# Altium PCB Sensor Subsystem.PcbDoc
Units mil, origin at the board's own origin, x right, y up, seen from the top; angles counter-clockwise.
Board outline 6000 x 5085 mil, 4 copper layers (Top Layer, GND, PWR, Bottom Layer), stack 23.756 mil thick; 72 components, 30 nets, 282 pads, 69 vias.
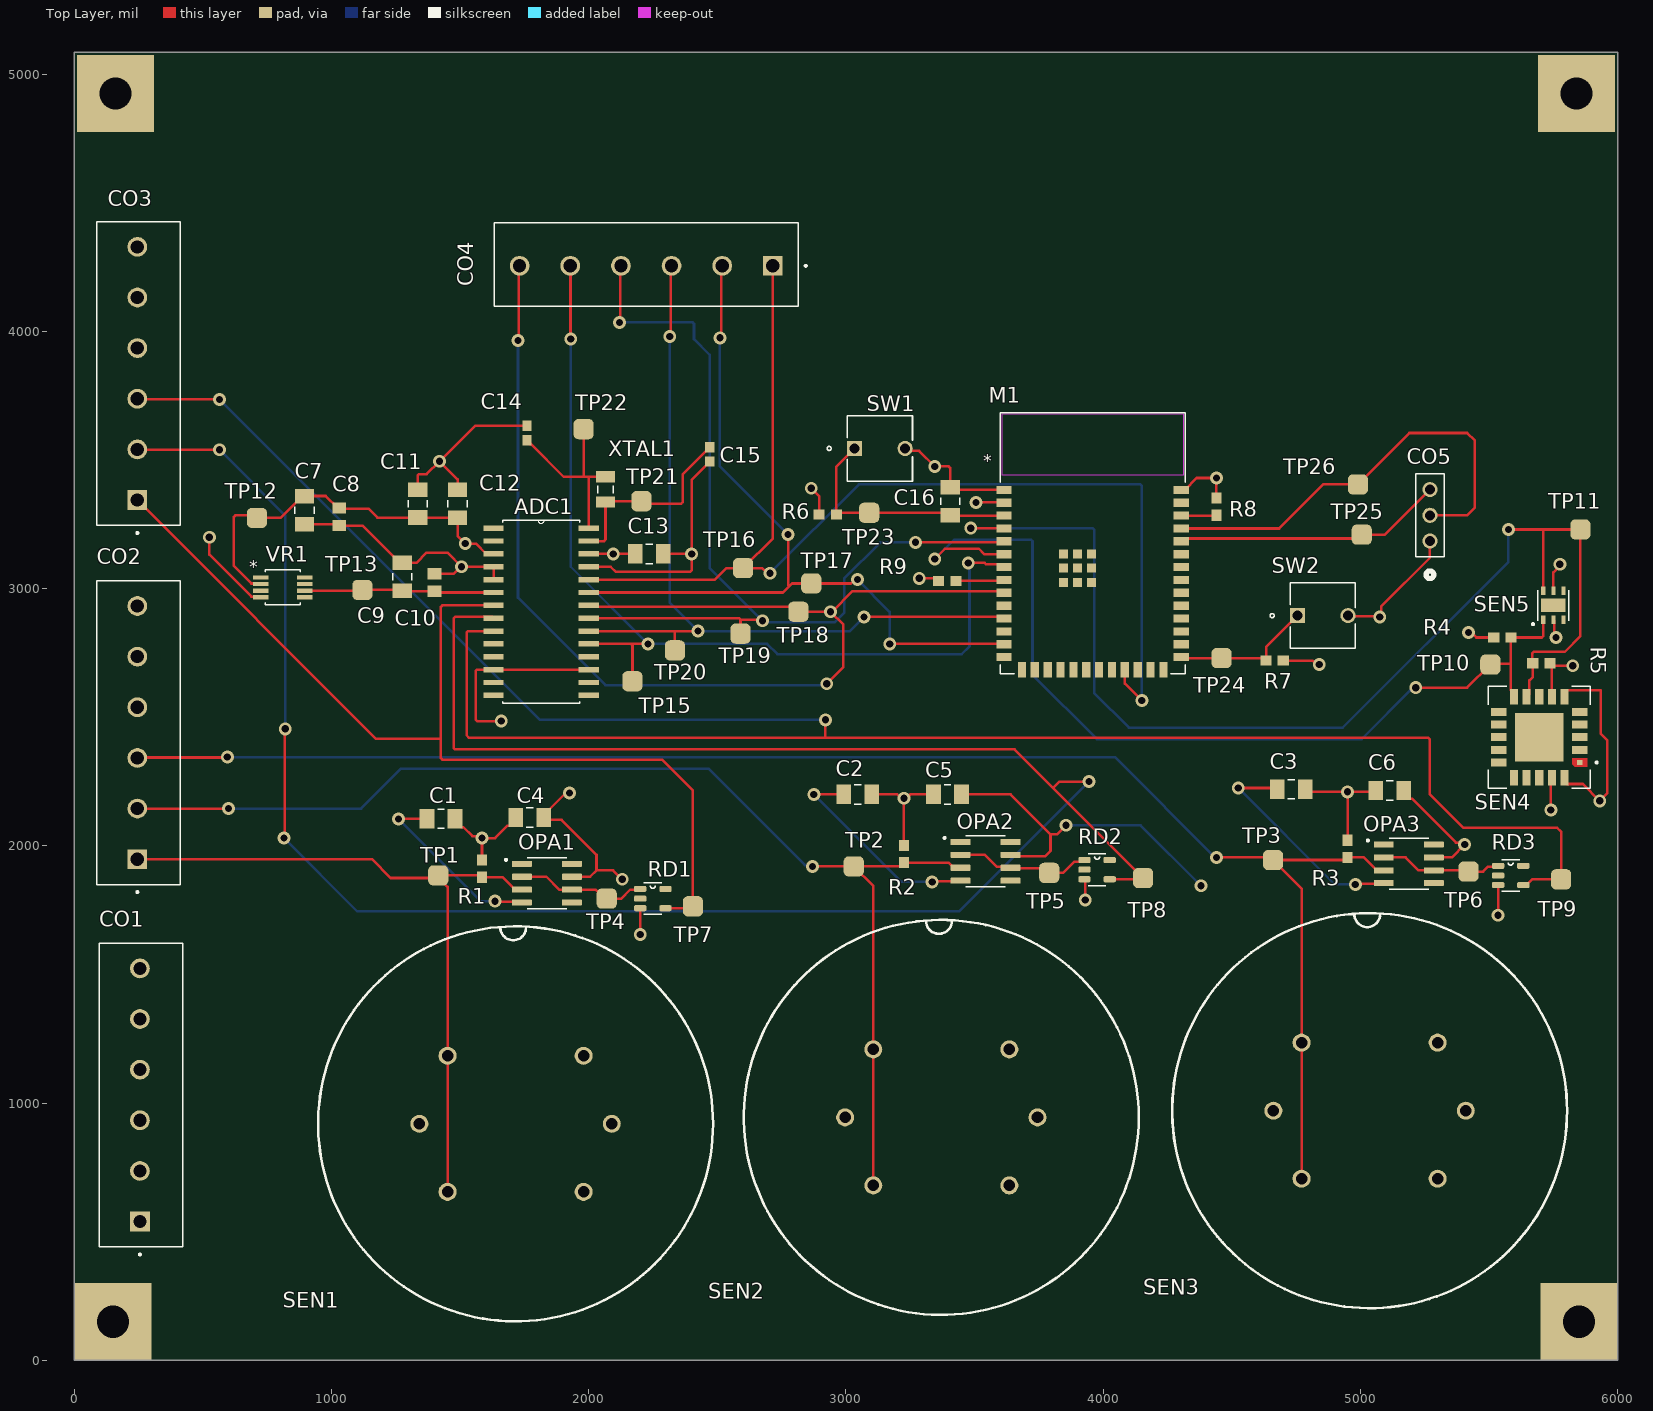
[diagram p0: Top Layer view]
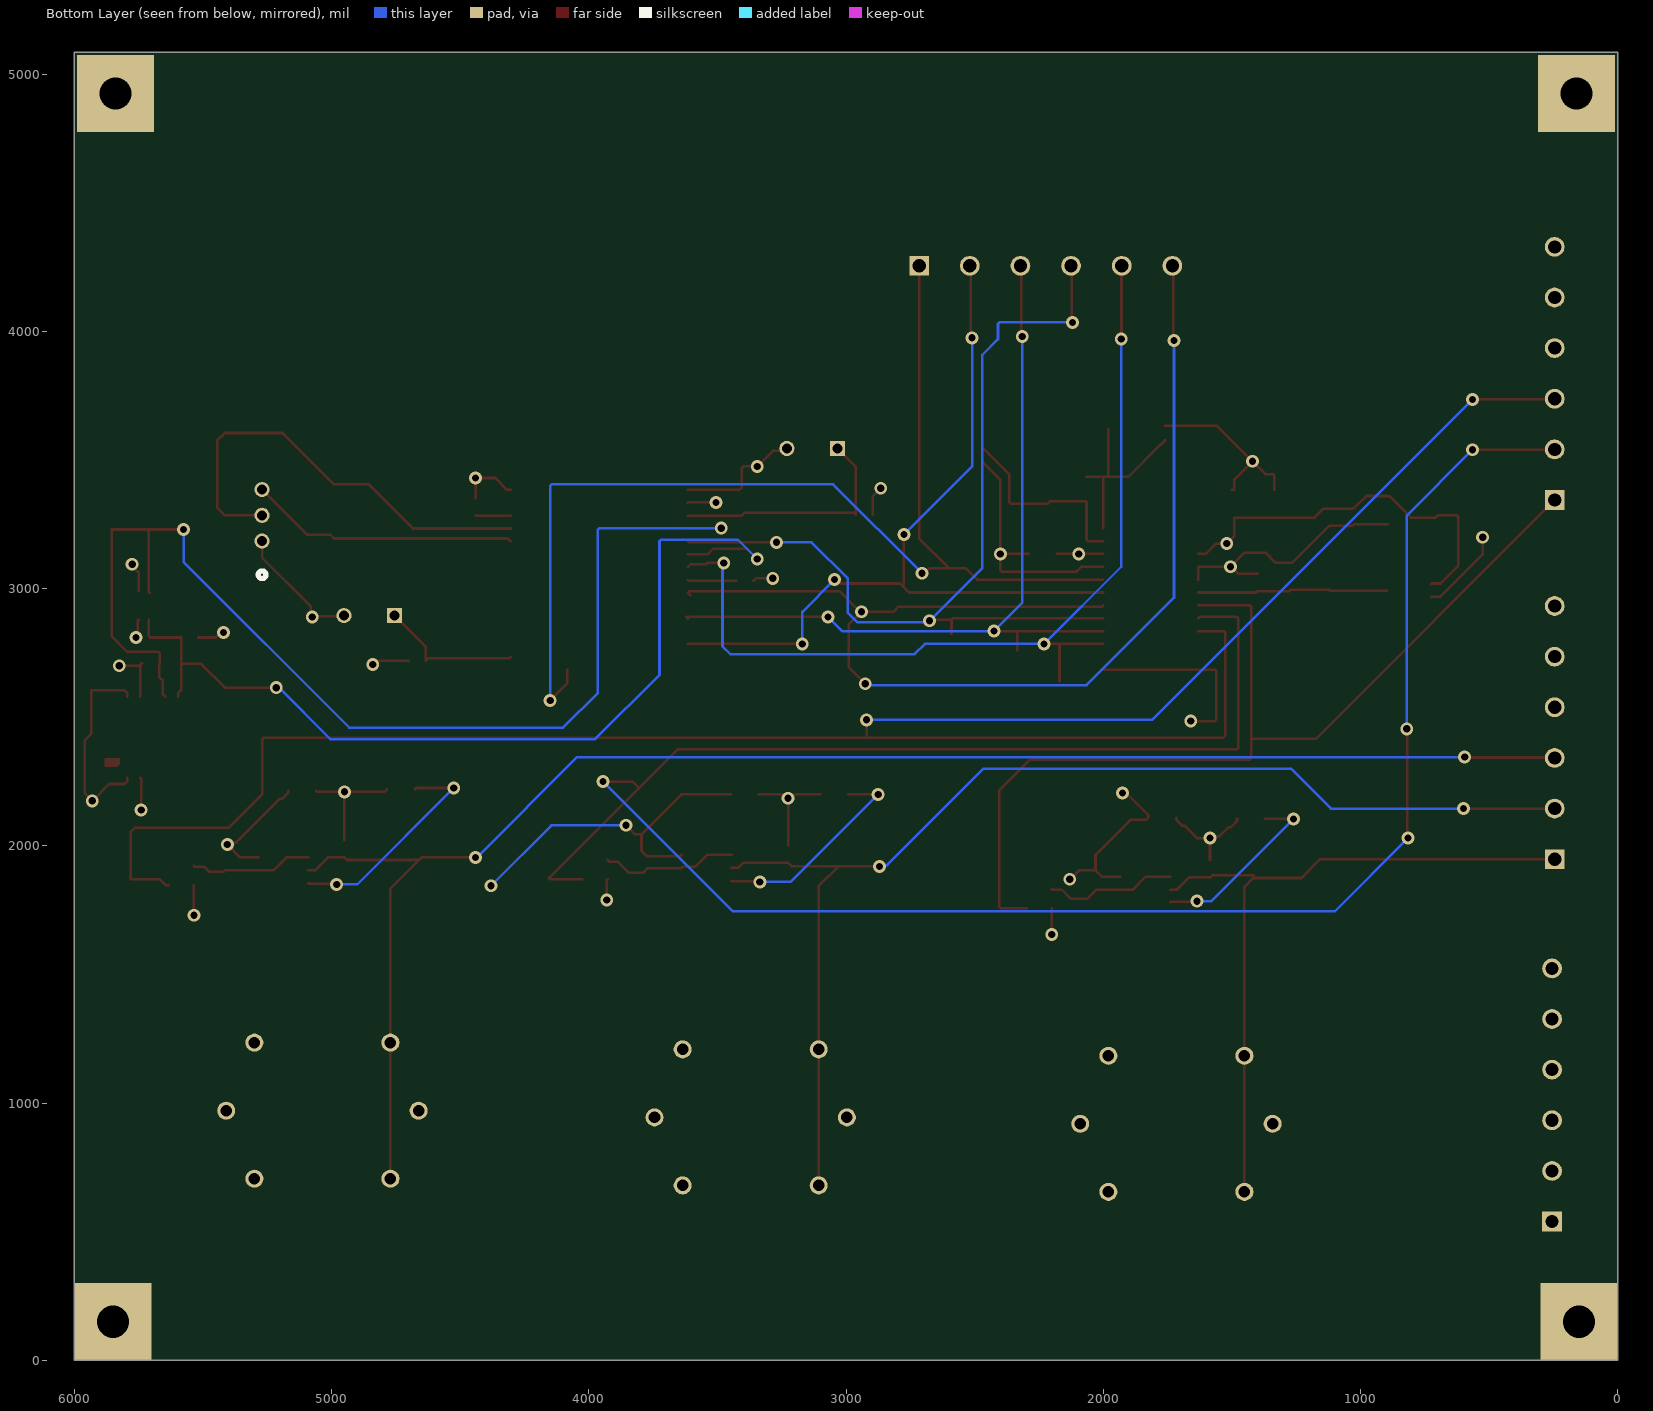
[diagram p1: Bottom Layer view, seen from below]
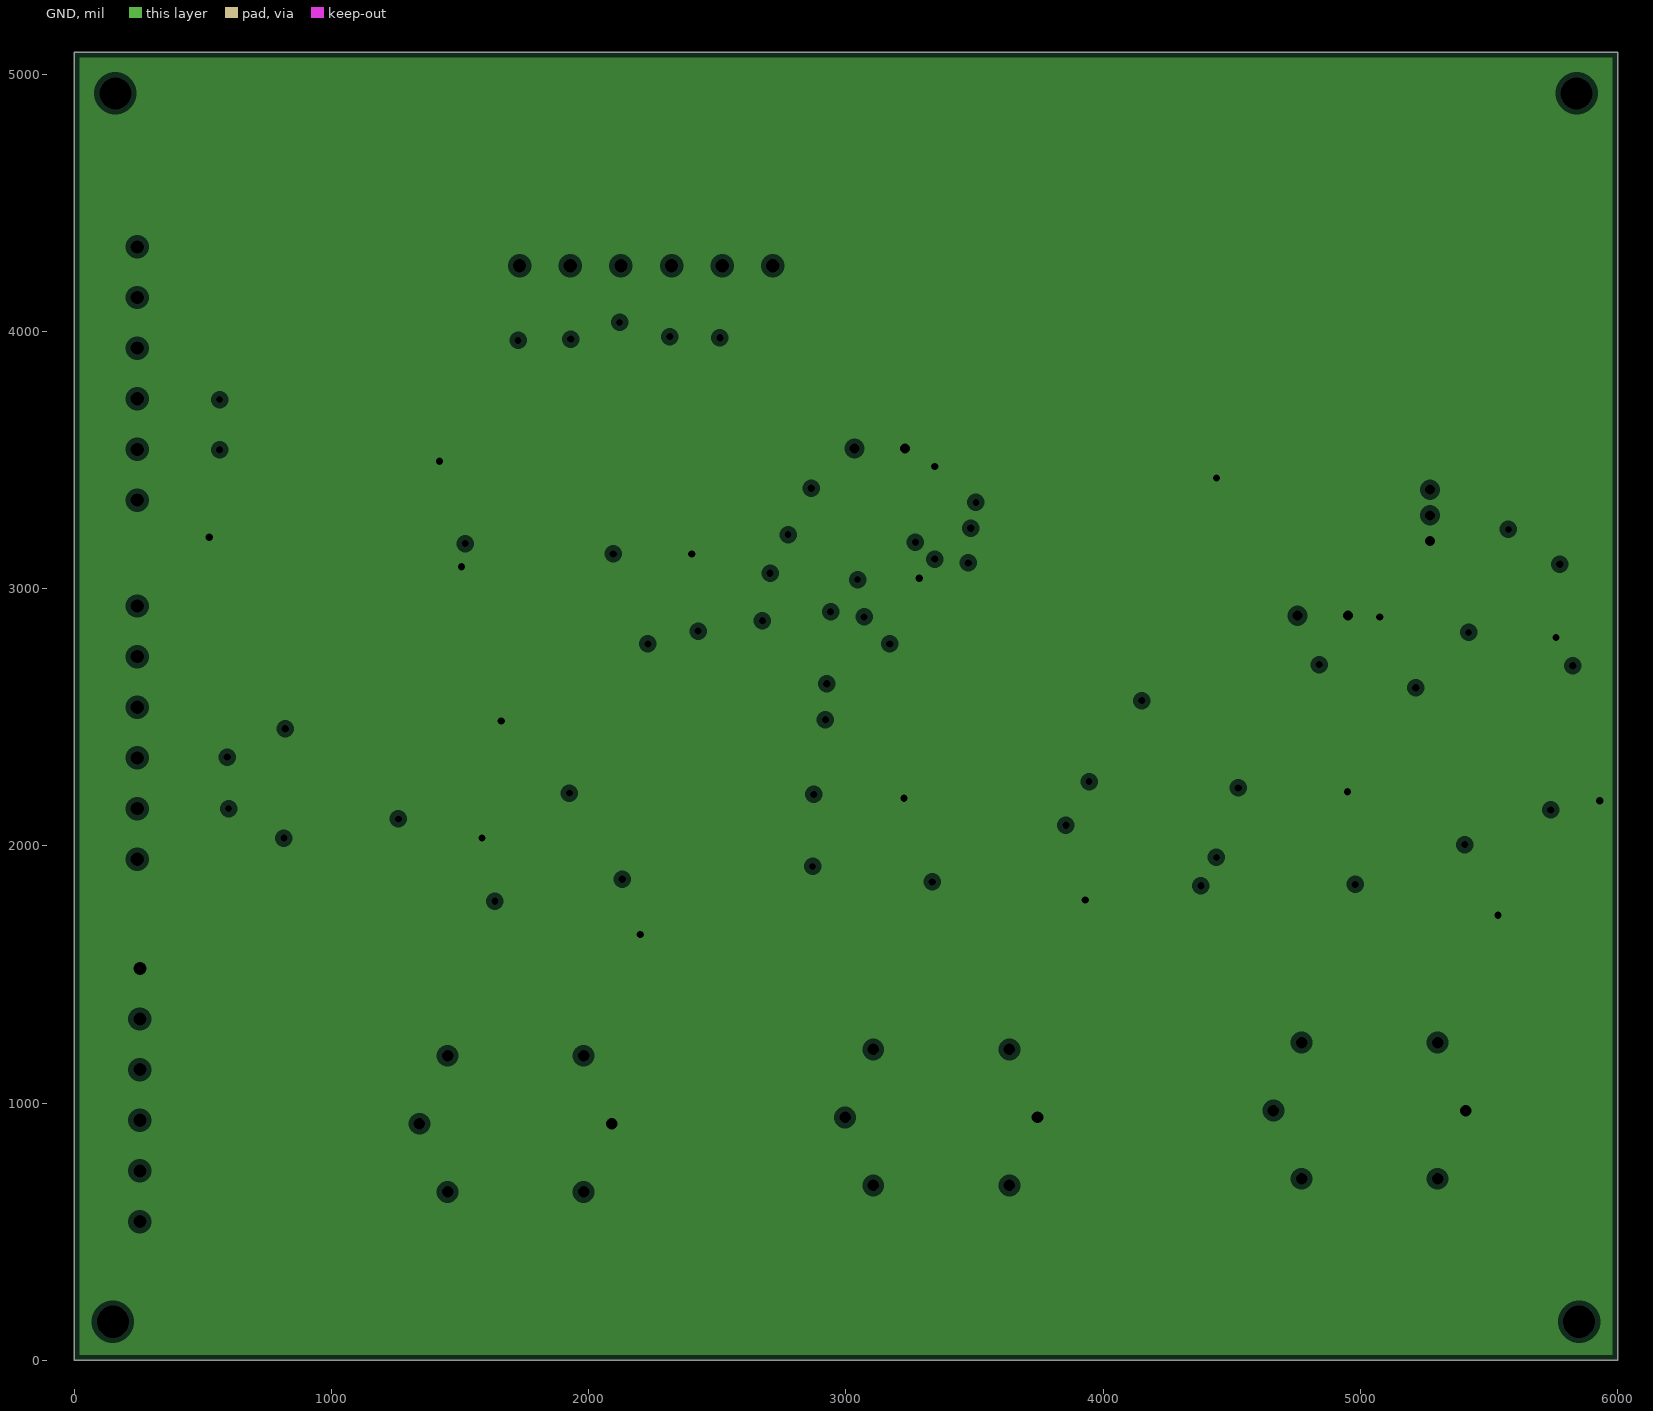
[diagram p2: GND, clearances drawn from the general rule]
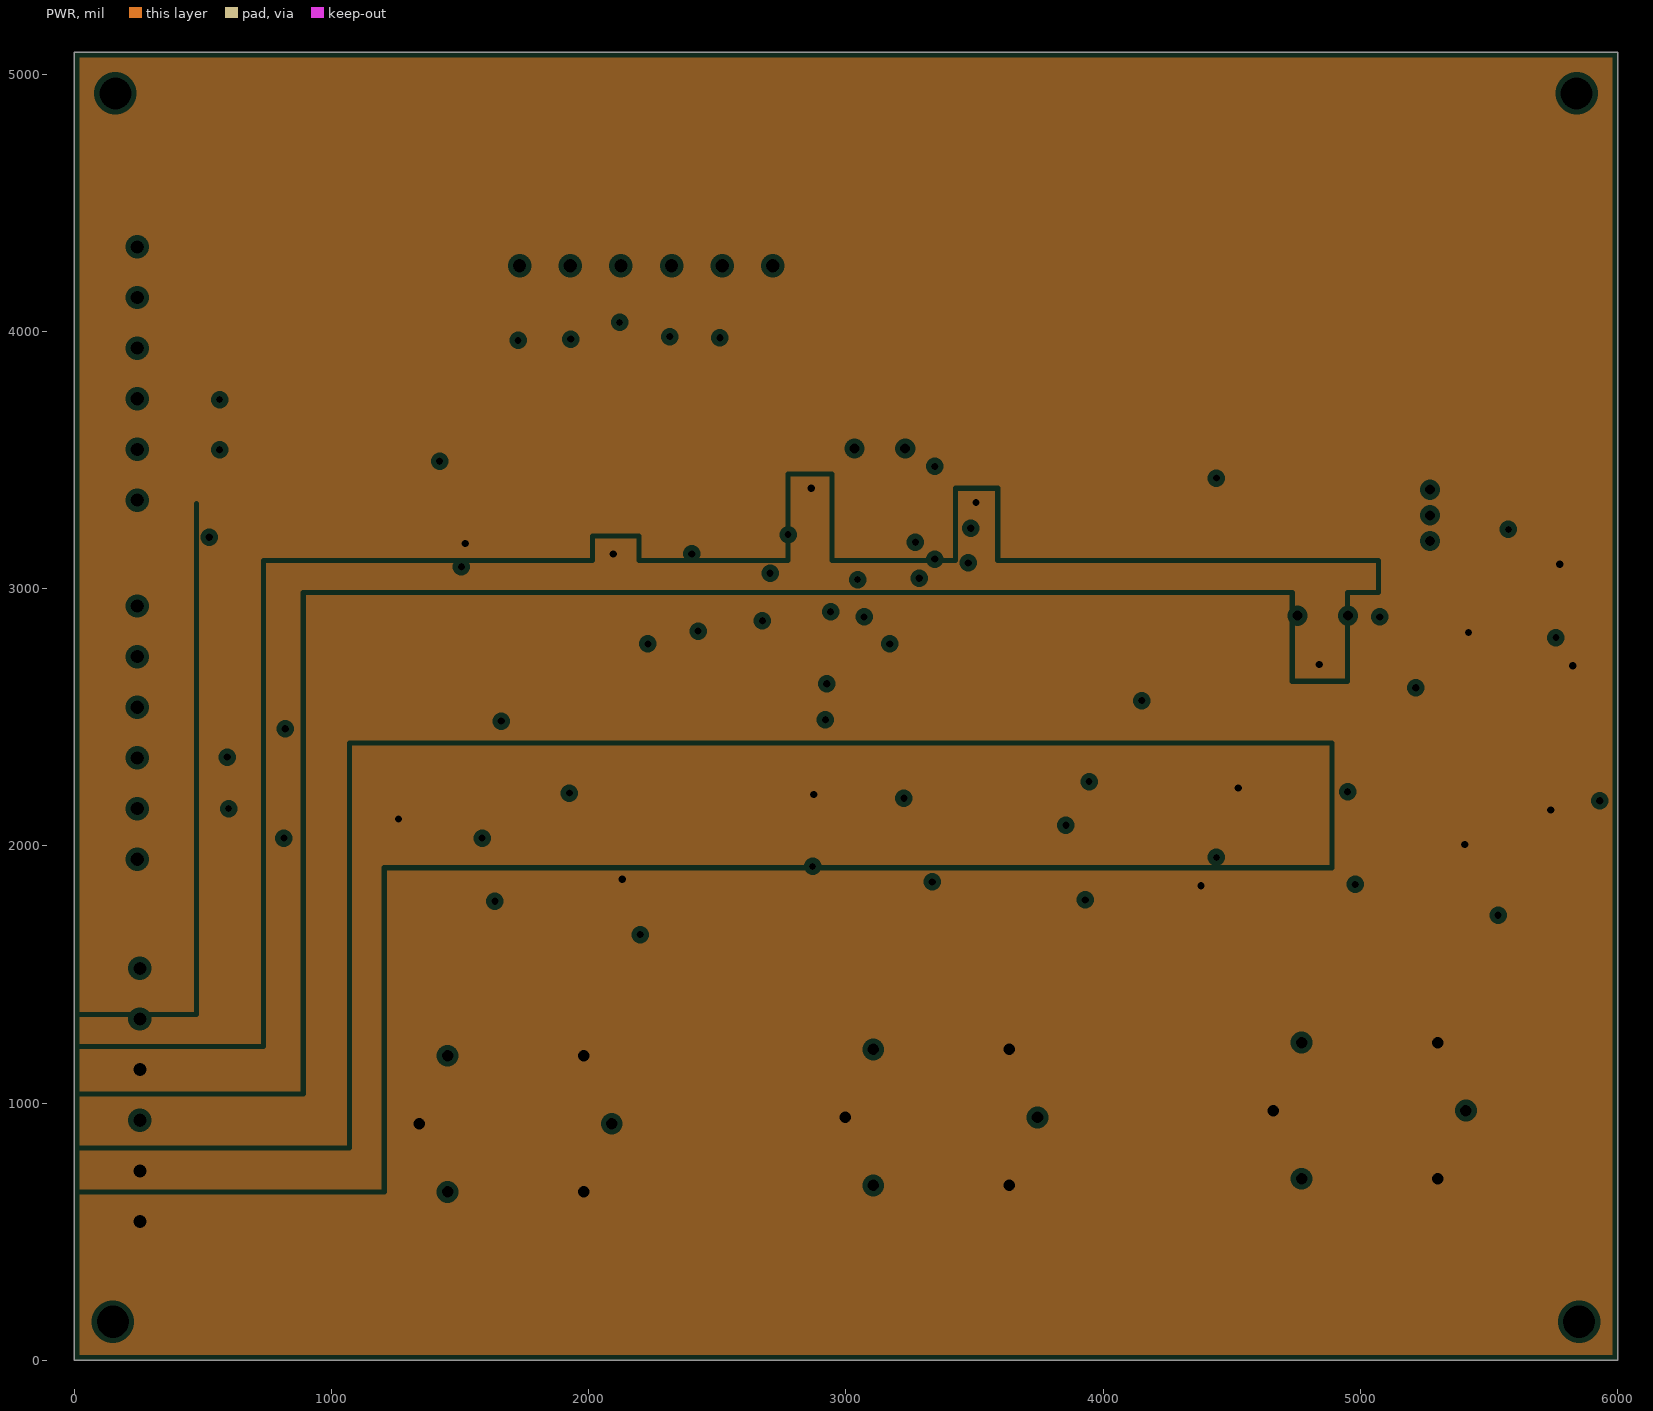
[diagram p3: PWR, clearances drawn from the general rule]

## Layer stack, top to bottom
Top Solder: solder mask 0.4, Solder Resist, Dk 3.5
Top Layer: signal copper 1.4
Dielectric 2: prepreg 2.8, PP-006, Dk 4.1
GND: plane copper 1.378, net GND
Dielectric 1: core 12.6, FR-4, Dk 4.8
PWR: plane copper 1.378, net 5V0
Dielectric 3: prepreg 2.8, PP-006, Dk 4.1
Bottom Layer: signal copper 1.4
Bottom Solder: solder mask 0.4, Solder Resist, Dk 3.5

## Board outline
0,0 6000,0 6000,5085 0,5085

## Design rules (kind name [scope] priority, off if disabled: settings)
Clearance [All] p1: gap=5 ignorepadtopadclearanceinfootprint=FALSE
HoleSize [All] p1: absolutevalues=TRUE maxlimit=250 minlimit=10 maxpercent=80.000 minpercent=20.000
MinimumSolderMaskSliver [All] p1: minsoldermaskwidth=5
PlaneClearance [All] p1: clearance=20
PlaneConnect [All] p1: planeconnectstyle=Relief reliefexpansion=20 reliefentries=4 reliefconductorwidth=10 reliefairgap=10
PolygonConnect [All] p1: connectstyle=Relief reliefconductorwidth=10 reliefentries=4 polygonreliefangle="90 Angle" airgapwidth=10
RoutingVias [All] p1: holewidth=28 width=50 viastyle="Through Hole" minholewidth=15 minwidth=35 maxholewidth=28 maxwidth=50
SilkToSilkClearance [All] p1: silktosilkclearance=5
SilkToSolderMaskClearance [IsPad] p1: minsilkscreentomaskgap=5 clearancetoexposedcopper=TRUE
SolderMaskExpansion [All] p1: expansion=4 istentingtop=FALSE
SupplyNets "Schematic Supply Nets_3" [InNet('3V3')] p1: voltage=0.000
SupplyNets "Schematic Supply Nets_2" [InNet('-5V0')] p2: voltage=0.000
SupplyNets "Schematic Supply Nets_1" [InNet('GND')] p3: voltage=0.000
SupplyNets "Schematic Supply Nets" [InNet('5V0')] p4: voltage=0.000
Width [All] p1: maxlimit=1000 minlimit=5 preferedwidth=10
24 further rules are at their usual default settings.

## Classes and differential pairs
component class "Sensor Subsystem Gas Monitoring": CO1
component class Microcontroller: C16 CO4 CO5 M1 R6 R7 R8 R9 SW1 SW2 TP23 TP24 TP25 TP26
component class "Digital to Analog": ADC1 C7 C8 C9 C10 C11 C12 C13 C14 C15 CO3 TP12 TP13 TP15 TP16 TP17 TP18 TP19 TP20 TP21 TP22 VR1 XTAL1
component class "Digital Sensors": R4 R5 SEN4 SEN5 TP10 TP11
component class "Analog Sensors": C1 C2 C3 C4 C5 C6 CO2 OPA1 OPA2 OPA3 R1 R2 R3 RD1 RD2 RD3 SEN2 SEN3 TP1 TP2 TP3 TP4 TP5 TP6 TP7 TP8 TP9

## Components (designator, comment, footprint, x,y, rotation, side; value= is the part's Value field where it differs from the comment)
ADC1 "AD7718BRZ-REEL7" SOIC127P1032X265-28N 1815,2910 r0 top
C1 "0.1uF" "0.1uF Capacitor" 1425.59,2105 r0 top
C2 "0.1uF" "0.1uF Capacitor" 3045.59,2200 r0 top
C3 "0.1uF" "0.1uF Capacitor" 4730.59,2220 r0 top
C4 "0.1uF" "0.1uF Capacitor" 1770,2110 r180 top
C5 "0.1uF" "0.1uF Capacitor" 3394.41,2200 r180 top
C6 "0.1uF" "0.1uF Capacitor" 5114.41,2215 r180 top
C7 "0.1uF" "0.1uF Capacitor" 895,3304.41 r270 top
C8 "47uF" CAPC2012X135N 1030,3278.98 r270 top
C9 "0.1uF" "0.1uF Capacitor" 1275,3045.59 r90 top
C10 "47uF" CAPC2012X135N 1400,3023.98 r90 top
C11 "10uF" CAPC3216X190N 1335,3330.59 r90 top
C12 "0.1uF" "0.1uF Capacitor" 1490,3329.41 r90 top
C13 "0.1uF" "0.1uF Capacitor" 2235.59,3135 r0 top
C14 "12pF" CAPC1608X90N 1760,3605 r90 top
C15 "12pF" CAPC1608X90N 2470,3522.09 r270 top
C16 "0.1uF" "0.1uF Capacitor" 3405,3339.41 r90 top
CO1 "1935200" PHOENIX_1935200 422.32,441.02 r90 top
CO2 "1935200" PHOENIX_1935200 412.32,1849.72 r90 top
CO3 "1935200" PHOENIX_1935200 412.32,3246.02 r90 top
CO4 "1935200" PHOENIX_1935200 2813.98,4422.32 r180 top
CO5 "PREC003SAAN-RC" CONN_PREC003SAAN-RC_SUL 5270,3185 r90 top
M1 "ESP32-S3-WROOM-1-N16R8" ESP32-S3-WROOM-1_EXP 3959.06,3176.73 r0 top
OPA1 "TL061ACD" SOIC127P599X175-8N 1837.24,1855 r0 top
OPA2 "TL061ACD" SOIC127P599X175-8N 3542.24,1940 r0 top
OPA3 "TL061ACD" SOIC127P599X175-8N 5187.76,1930 r0 top
R1 "10k" 0603 1585,1911.54 r90 top
R2 "10k" 0603 3225,1968.46 r90 top
R3 "10k" 0603 4950,1988.46 r90 top
R4 "10k" 0603 5551.54,2810 r0 top
R5 "10k" 0603 5703.46,2710 r180 top
R6 "10k" 0603 2929.04,3287.5 r0 top
R7 "10k" 0603 4666.54,2720 r180 top
R8 "10k" 0603 4440,3318.46 r90 top
R9 "10k" 0603 3393.46,3030 r180 top
RD1 "MAX5492LC10000+T" SOT95P280X145-5N 2249.02,1795 r0 top
RD2 "MAX5492LC10000+T" SOT95P280X145-5N 3975.98,1907.6 r0 top
RD3 "MAX5492LC10000+T" SOT95P280X145-5N 5584.02,1885 r0 top
SEN1 "MQ136" MQ136 1715.44,918.77 r0 top
SEN2 "MQ137" MQ137 3370.53,944.47 r0 top
SEN3 "MQ-4" MQ4 5035.03,970.68 r0 top
SEN4 "SCD41-D-R2" XDCR_SCD41-D-R2 5695,2422.48 r180 top
SEN5 "HDC1080DMBR" SON100P300X300X80-7N 5750,2935 r90 top
SW1 "TL59AF160Q" SW_TL59AF160Q_EWI 3033.15,3545 r0 top
SW2 "TL59AF160Q" SW_TL59AF160Q_EWI 4755,2895 r0 top
TP1 "TP" TestPoint 1415,1885 r0 top
TP2 "TP" TestPoint 3030,1920 r0 top
TP3 "TP" TestPoint 4660,1945 r0 top
TP4 "TP" TestPoint 2070,1795 r0 top
TP5 "TP" TestPoint 3790,1895 r0 top
TP6 "TP" TestPoint 5420,1900 r0 top
TP7 "TP" TestPoint 2405,1765 r0 top
TP8 "TP" TestPoint 4155,1875 r0 top
TP9 "TP" TestPoint 5780,1870 r0 top
TP10 "TP" TestPoint 5505,2705 r0 top
TP11 "TP" TestPoint 5855,3230 r90 top
TP12 "TP" TestPoint 710,3275 r0 top
TP13 "TP" TestPoint 1120,2995 r0 top
TP15 "TP" TestPoint 2170,2640 r0 top
TP16 "TP" TestPoint 2600,3080 r0 top
TP17 "TP" TestPoint 2865,3020 r0 top
TP18 "TP" TestPoint 2815,2910 r0 top
TP19 "TP" TestPoint 2590,2825 r0 top
TP20 "TP" TestPoint 2335,2760 r0 top
TP21 "TP" TestPoint 2205,3340 r0 top
TP22 "TP" TestPoint 1980,3620 r0 top
TP23 "TP" TestPoint 3090,3295 r0 top
TP24 "TP" TestPoint 4460,2730 r0 top
TP25 "TP" TestPoint 5005,3210 r0 top
TP26 "TP" TestPoint 4990,3405 r0 top
VR1 "ADR431BRMZ-R7" RM_8_ADI 810,3005 r0 top
XTAL1 "32.768 kHz" XTAL_ABS07-32.768KHZ-T 2065,3385.79 r90 top

## Footprints (in the part's own frame and the unit in brackets; to place one, negate y for a bottom-side part, rotate by r counter-clockwise, add the part's x,y. Pads: shape width x height; smd on the part's side, far side on the other; paste and mask are expansions set on the pad)
"0.1uF Capacitor" [mm]
  rect 1.45x1.91 smd: 1(-1.382,0) 2(1.382,0)
  silkscreen extent -0.34,-0.95 0.34,0.95
0603 [mm]
  rect 1.1x1 smd: 1(-0.85,0) 2(0.85,0)
CAPC1608X90N [mm]
  rect 1.01x0.93 smd: 1(-0.709,0) 2(0.709,0)
  body extent -0.8,-0.4 0.8,0.4, height 0.9
CAPC2012X135N [mm]
  rect 1.1x1.38 smd: 1(-0.863,0) 2(0.863,0)
CAPC3216X190N [mm]
  rect 1.45x1.91 smd: 1(-1.382,0) 2(1.382,0)
  silkscreen extent -0.34,-0.95 0.34,0.95
CONN_PREC003SAAN-RC_SUL [mil]
  round 59 / inner round 60 / far side round 59 hole 39 paste-99999 mask+0: 1(0,0) 2(100,0) 3(200,0)
  silkscreen extent -146,-55 261,55
ESP32-S3-WROOM-1_EXP [mil]
  rect 59x32 smd paste+0 mask+0: 1(-344.49,207.09) 2(-344.49,157.09) 3(-344.49,107.09) 4(-344.49,57.09) 5(-344.49,7.09) 6(-344.49,-42.91) 7(-344.49,-92.91) 8(-344.49,-142.91) 9(-344.49,-192.91) 10(-344.49,-242.91) 11(-344.49,-292.91) 12(-344.49,-342.91) 13(-344.49,-392.91) 14(-344.49,-442.91) 27(344.49,-442.91) 28(344.49,-392.91) 29(344.49,-342.91) 30(344.49,-292.91) 31(344.49,-242.91) 32(344.49,-192.91) 33(344.49,-142.91) 34(344.49,-92.91) 35(344.49,-42.91) 36(344.49,7.09) 37(344.49,57.09) 38(344.49,107.09) 39(344.49,157.09) 40(344.49,207.09)
  rect 32x59 smd paste+0 mask+0: 15(-275,-492.13) 16(-225,-492.13) 17(-175,-492.13) 18(-125,-492.13) 19(-75,-492.13) 20(-25,-492.13) 21(25,-492.13) 22(75,-492.13) 23(125,-492.13) 24(175,-492.13) 25(225,-492.13) 26(275,-492.13)
  rect 35x35 smd paste+0 mask+0: 41(-59.06,-96.85) 42(-114.17,-41.73) 43(-114.17,-96.85) 44(-114.17,-151.97) 45(-59.06,-151.97) 46(-3.94,-151.97) 47(-3.94,-96.85) 48(-3.94,-41.73) 49(-59.06,-41.73)
  Top Layer keep-out region: 354.5,502 -354.5,502 -354.5,266 354.5,266
  silkscreen extent -360,-507 360,507
MQ4 [mil]
  round 70 hole 45: 1(-263.96,264.32) 2(-373.52,-0.14) 3(-263.96,-264.61) 4(264.97,-264.62) 5(374.52,-0.14) 6(264.97,264.32)
  silkscreen extent -767,-768 768,768
MQ136 [mil]
  round 70 hole 45: 1(-264.38,265.17) 2(-373.93,0.71) 3(-264.38,-263.76) 4(264.56,-263.77) 5(374.1,0.71) 6(264.56,265.17)
  silkscreen extent -767,-767 768,768
MQ137 [mil]
  round 70 hole 45: 1(-264.46,264.46) 2(-374.02,0) 3(-264.46,-264.46) 4(264.47,-264.47) 5(374.02,0) 6(264.47,264.46)
  silkscreen extent -768,-768 768,768
PHOENIX_1935200 [mm]
  rect 1.95x1.95 / inner round 1.95 / far side rect 1.95x1.95 hole 1.3: 1(2.5,4.25)
  round 1.95 hole 1.3: 2(7.5,4.25) 3(12.5,4.25) 4(17.5,4.25) 5(22.5,4.25) 6(27.5,4.25)
  silkscreen extent -0.85,0 30,8.25
RM_8_ADI [mil]
  rect 60x17 smd paste+0 mask+0: 1(-85.5,38.39) 2(-85.5,12.8) 3(-85.5,-12.8) 4(-85.5,-38.39) 5(85.5,-38.39) 6(85.5,-12.8) 7(85.5,12.8) 8(85.5,38.39)
  silkscreen extent -68,-68 68,68, body extent -101,-63 101,63, height 43
SOIC127P599X175-8N [mm]
  rrect25% 1.97x0.6 smd: 1(-2.47,1.905) 2(-2.47,0.635) 3(-2.47,-0.635) 4(-2.47,-1.905) 5(2.47,-1.905) 6(2.47,-0.635) 7(2.47,0.635) 8(2.47,1.905)
  silkscreen extent -4.14,-2.52 1.95,2.52
SOIC127P1032X265-28N [mil]
  rect 78x21 smd: 1(-185,325) 2(-185,275) 3(-185,225) 4(-185,175) 5(-185,125) 6(-185,75) 7(-185,25) 8(-185,-25) 9(-185,-75) 10(-185,-125) 11(-185,-175) 12(-185,-225) 13(-185,-275) 14(-185,-325) 15(185,-325) 16(185,-275) 17(185,-225) 18(185,-175) 19(185,-125) 20(185,-75) 21(185,-25) 22(185,25) 23(185,75) 24(185,125) 25(185,175) 26(185,225) 27(185,275) 28(185,325)
  silkscreen extent -150,-356 150,356
SON100P300X300X80-7N [mm]
  rrect25% 0.86x0.42 smd: 1(-1.435,1) 2(-1.435,0) 3(-1.435,-1) 4(1.435,-1) 5(1.435,0) 6(1.435,1)
  rect 1.322x2.4 smd paste-2: 7(0,0)
  silkscreen extent -1.96,-1.53 1.5,2.12, body extent -1.5,-1.5 1.5,1.5, height 0.75
SOT95P280X145-5N [mm]
  rrect50% 1.22x0.6 smd: 1(-1.245,0.95) 2(-1.245,0) 3(-1.245,-0.95) 4(1.245,-0.95) 5(1.245,0.95)
  silkscreen extent -0.88,-1.57 0.88,1.57
SW_TL59AF160Q_EWI [mil]
  rect 59x59 / inner round 60 / far side rect 59x59 hole 39 paste-99999 mask+0: 1(0,0)
  round 59 / inner round 60 / far side round 59 hole 39 paste-99999 mask+0: 2(196.85,0)
  silkscreen extent -107,-127 225,127
TestPoint [mm]
  rrect50% 2x2 smd: 1(0,0)
XDCR_SCD41-D-R2 [mm]
  rect 0.5x0.5 smd paste-1 mask+0: 1(-4,2.5)
  rect 1.5x0.8 smd paste-0.125 mask+0.1: 2(-4,1.25) 3(-4,0) 4(-4,-1.25) 5(-4,-2.5) 11(4,-2.5) 12(4,-1.25) 13(4,0) 14(4,1.25) 15(4,2.5)
  rect 0.8x1.5 smd paste-0.125 mask+0.1: 6(-2.5,-4) 7(-1.25,-4) 8(0,-4) 9(1.25,-4) 10(2.5,-4) 16(2.5,4) 17(1.25,4) 18(0,4) 19(-1.25,4) 20(-2.5,4)
  rect 4.8x4.8 smd paste-3 mask+0.1: 21(0,0)
  Top Layer region: -3.25,2.65 -3.25,2.1 -4.75,2.1 -4.75,2.9 -3.5,2.9
  silkscreen extent -5.77,-5.05 5.05,5.05, body extent -5.05,-5.48 5.05,0.83, height 5.05
XTAL_ABS07-32.768KHZ-T [mm]
  rect 1.1x1.9 smd: 1(-1.25,0) 2(1.25,0)
  silkscreen extent -0.38,-0.75 0.38,0.75, body extent -1.6,-0.75 1.6,0.75, height 0.89

## Part data
ADC1: "24-Bit, 8/10-Channel, Low Voltage, Low Power, Sigma Delta ADC", Package="SOIC -28 Analog Devices", Check_prices=https://www.snapeda.com/parts/AD7718BRZ-REEL7/Analog+Devices/view-part/?ref=eda, MF="Analog Devices", MP=AD7718BRZ-REEL7, SnapEDA_Link=https://www.snapeda.com/parts/AD7718BRZ-REEL7/Analog+Devices/view-part/?ref=snap
C1 C2 C3 C4 C5 C6 C7 C9 C12 C13 C16: library part CC1206JRX7R9BB104, "No Description Available", Mfr_Name=Yageo
C8 C10: library part CL21A476MQYNNNG, "47ÂµF Â±20% 6.3V Ceramic Capacitor X5R 0805 _2012 Metric_", Package="0805 Samsung", Digi-Key_Part_Number=1276-6467-1-ND, Digi-Key_Purchase_URL=https://www.digikey.com/product-detail/en/samsung-electro-mechanics/CL21A476MQYNNNG/1276-6467-1-ND/5958095?utm_source=snapeda&utm_medium=aggregator&utm_campaign=symbol, MF="Samsung Electro-Mechanics", MP=CL21A476MQYNNNG, SnapEDA_Link=https://www.snapeda.com/parts/CL21A476MQYNNNG/Samsung%20Electro-Mechanics/view-part/3597942/?ref=snap
C11: library part GRJ31CR61E106KE11L, "CAP CER 10UF 25V X5R 1206", Package=None, Availability=Unavailable, MP=GRJ31CR61E106KE11L, Price=None
C14 C15: library part CGA3E2C0G1H120J080AA, "Multilayer Ceramic Capacitor, CGA Series, 12 pF, - 5%, C0G / NP0, 50 V, 0603 [1608 Metric]", Package="1608 TDK", Check_prices=https://www.snapeda.com/parts/CGA3E2C0G1H120J080AA/TDK/view-part/?ref=eda, MF=TDK, MP=CGA3E2C0G1H120J080AA, SnapEDA_Link=https://www.snapeda.com/parts/CGA3E2C0G1H120J080AA/TDK/view-part/?ref=snap
CO1 CO2 CO3 CO4: "PCB terminal block - nominal current: 17.5 A - rated voltage (III/2): 400 V - nominal cross section: 1.5 mm² - pitch: 5 mm - number of positions: 6 - connection method: Screw connection with wire protector - mounting: Wave soldering - conductor/PCB connection direction: 0 ° - color: green - Pin layout: Linear pinning - Solder pin [P]: 3.5 mm", Package=None, Check_prices=https://www.snapeda.com/parts/1935200/Littelfuse/view-part/?ref=eda, MF=Littelfuse, MP=1935200, SnapEDA_Link=https://www.snapeda.com/parts/1935200/Littelfuse/view-part/?ref=snap
CO5: "No Description Available", Mfr_Name=Sullins, RefDes=RefDes, Type=Type
M1: "No Description Available", Mfr_Name="Espressif Systems", RefDes=RefDes, Type=Type
OPA1 OPA2 OPA3: Package=None, Availability=Unavailable, MP=TL061ACD, Price=None
R1 R2 R3 R4 R5 R6 R7 R8 R9: library part RC0603FR-1310KL, "http://octopart.com/rc0603fr-1310kl-yageo+%2F+phycomp-25905087", Package=None, Availability=Unavailable, MP=RC0603FR-1310KL, Price=None
RD1 RD2 RD3: "Res NET 9.09K Ohm/910 Ohm 0.1% 0.5714W Â±35ppm/Â°C VOLT/D 5-Pin SOT-23 Gull Wing SMD T/R", Package=None, Check_prices=https://www.snapeda.com/parts/MAX5492LC10000+T/Maxim+Integrated/view-part/?ref=eda, MF="Maxim Integrated Products", MP=MAX5492LC10000+T, SnapEDA_Link=https://www.snapeda.com/parts/MAX5492LC10000+T/Maxim+Integrated/view-part/?ref=snap
SEN1: "Hydrogen Sulfide Sensor"
SEN2: "Ammonia Sensor"
SEN3: "Methane Sensor"
SEN4: "Air Quality Sensor CO2 Sensor 2.5V/3.3V/5V 20-Pin SMD EP", Package=None, Availability="In Stock", Check_prices=https://www.snapeda.com/parts/SCD41-D-R2/Sensirion+AG/view-part/?ref=eda, MF="Sensirion AG", MP=SCD41-D-R2, Price=None, Purchase-URL=https://pricing.snapeda.com/search/part/SCD41-D-R2/?ref=eda, SnapEDA_Link=https://www.snapeda.com/parts/SCD41-D-R2/Sensirion+AG/view-part/?ref=snap
SEN5: "Temperature and Humidity Sensor", Package="WSON-6 Texas Instruments", Availability=Unavailable, MF="Texas Instruments", MP=HDC1080DMBR, Price=None, Purchase-URL=https://pricing.snapeda.com/search/part/HDC1080DMBR/?ref=eda, SnapEDA_Link=https://www.snapeda.com/parts/HDC1080DMBR/Texas%20Instruments/view-part/472819/?ref=snap
SW1 SW2: "No Description Available", Mfr_Name=E-Switch
TP1 TP2 TP3 TP4 TP5 TP6 TP7 TP8 TP9 TP10 TP11 TP12 TP13 TP15 TP16 TP17 TP18 TP19 TP20 TP21 TP22 TP23 TP24 TP25 TP26: library part TestPoint, "Test point for voltage, current, ect."
VR1: "No Description Available", Mfr_Name="Analog Devices Inc", RefDes=RefDes, Type=Type
XTAL1: library part ABS07-32.768KHZ-T, "32.768 kHz Â±20ppm Crystal 12.5pF 70 kOhms 2-SMD, No Lead", Package="SMD-2 Abracon LLC", Availability="In Stock", Check_prices=https://www.snapeda.com/parts/ABS07-32.768KHZ-T/Abracon+LLC/view-part/?ref=eda, MF=Abracon, MP=ABS07-32.768KHZ-T, Price=None, Purchase-URL=https://pricing.snapeda.com/search/part/ABS07-32.768KHZ-T/?ref=eda, SnapEDA_Link=https://www.snapeda.com/parts/ABS07-32.768KHZ-T/Abracon+LLC/view-part/?ref=snap

## Free pads (board coordinates)
  rect 300x300 hole 125: MH(150,150) MH(160,4925) MH(5840,4925) MH(5850,150)

## Via types
v1: diameter 50, hole 28, Top Layer to Bottom Layer, 69 vias

## Nets (pads, with @x,y where several pads share a name; then routed paths per layer and width w, separated by ;. In a path a pad name is that pad's centre, name@x,y a point inside that pad or via, vN(x,y) a via of type N, cw(c..) or ccw(c..) an arc to the next point about the centre after c; other vN are vias at no path point)
3V3: ADC1.26 C13.1 CO1.4 M1.2 R6.1 R7.1 | length 552.6
  Top Layer w10: ADC1.26 v1(2095,3135) C13.1 ; v1(2865,3390) 2895.57,3359.43 R6.1 ; v1(3505,3335) 3613.39,3335 M1.2 ; R7.1 4814.18,2720 4829.18,2705 v1(4840,2705)
5V0: ADC1.3 C4.1 C5.1 C6.1 C7.1 C8.1 C11.1 C12.1 CO1.1 OPA1.7 OPA2.7 OPA3.7 R4.1 R5.1 SEN1.2 SEN1.4 SEN1.6 SEN2.2 SEN2.4 SEN2.6 SEN3.2 SEN3.4 SEN3.6 SEN4.7 SEN4.19 SEN5.5 TP12.1 VR1.2 | length 4588
  Top Layer w10: CO1.1 CO1.1@265.55,550 ; VR1.2 722.41,3019.89 688.29,3019.89 620,3088.17 620,3279.14 625.86,3285 700,3285 TP12.1 802.13,3275 885.94,3358.82 C7.1 896.18,3360 977.44,3360 1024.49,3312.95 C8.1 1032.95,3310 1145,3310 1178.82,3276.18 C11.1 1336.18,3275 C12.1 1490,3205 v1(1520,3175) 1561.5,3175 1601.5,3135 ADC1.3 ; v1(1925,2205) 1917.35,2197.35 1902.7,2197.35 1824.41,2119.06 C4.1 1833.46,2100.94 1894.06,2100.94 2030,1965 2030,1905 ; OPA1.7 2005,1880 2030,1905 ; v1(2130,1870) 2095,1905 2030,1905 ; C5.1 3640,2200 3795,2045 ; OPA2.7 3644.49,1960 3775,1960 3795,1980 3795,2045 ; v1(3855,2080) 3820,2045 3795,2045 ; C6.1 5168.82,2205.94 5192.36,2182.4 5201.42,2182.4 5371.17,2012.65 5397.35,2012.65 v1(5405,2005) 5355,1955 OPA3.7 ; v1(5420,2830) 5430.82,2830 5450.82,2810 R4.1 ; R5.1@5738.9,2710 R5.1 R5.1@5744.21,2702.72 ; v1(5740,2140) 5740,2260.79 SEN4.19 ; SEN4.7 R5.1@5744.21,2702.72 ; SEN5.5 5750,3063.43 5775,3088.43 v1(5775,3095) ; v1(5825,2700) 5746.93,2700 R5.1@5744.21,2702.72
  Bottom Layer w10: v1(3855,2080) 4145,2080 v1(4380,1845)
-5V0: C1.1 C2.1 C3.1 CO1.2 OPA1.4 OPA2.4 OPA3.4 | length 2437.2
  Top Layer w10: CO1.2 CO1.2@259.35,740.65 ; v1(1260,2105) C1.1 ; v1(1635,1785) 1637.5,1782.5 1737.5,1782.5 OPA1.4 ; v1(2875,2200) C2.1 ; v1(3335,1860) 3337.5,1862.5 3442.5,1862.5 OPA2.4 ; v1(4525,2225) 4671.18,2225 C3.1 ; v1(4980,1850) 4982.5,1852.5 5088.01,1852.5 OPA3.4
  Bottom Layer w10: v1(1260,2105) 1580,1785 v1(1635,1785) ; v1(2875,2200) 3215,1860 v1(3335,1860) ; v1(4525,2225) 4900,1850 v1(4980,1850)
CH4: CO2.3 OPA3.3 R3.1 SEN3.1 SEN3.3 TP3.1 | length 6322.3
  Top Layer w10: CO2.3 246.57,2343.43 593.43,2343.43 v1(595,2345) ; v1(4440,1955) 4650,1955 TP3.1 ; SEN3.3 SEN3.1 4771.06,1833.94 TP3.1 ; OPA3.3 5063.54,1905 5013.54,1955 R3.1 4940,1945 TP3.1
  Bottom Layer w10: v1(595,2345) 4045,2345 4435,1955 v1(4440,1955)
"CH4 2": ADC1.9 CO3.3 RD3.4 TP9.1 | length 8645.6
  Top Layer w10: CO3.3 246.57,3736.57 563.43,3736.57 v1(565,3735) ; ADC1.9 1530.86,2835 1525,2829.14 1525,2430 1535,2420 2920,2420 ; v1(2920,2490) 2920,2420 ; RD3.4 5645.24,1847.6 5667.64,1870 TP9.1 5780,2055 5765,2070 5400,2070 5270,2200 5270,2414.14 5264.14,2420 2920,2420
  Bottom Layer w10: v1(565,3735) 1810,2490 v1(2920,2490)
CLK: ADC1.20 CO4.3 M1.11 TP20.1 | length 3194.2
  Top Layer w10: ADC1.20 2329.14,2835 ; v1(2315,3980) 2318.43,3983.43 2318.43,4251.57 CO4.3 ; TP20.1 2335,2829.14 2329.14,2835 ; v1(2425,2835) 2329.14,2835 ; v1(3070,2890) 3608.39,2890 M1.11 3614.57,2884.57 M1.11@3620,2890
  Bottom Layer w10: v1(2315,3980) 2315,2945 v1(2425,2835) 3015,2835 v1(3070,2890)
CS*: ADC1.21 CO4.4 M1.5 TP19.1 | length 3669.9
  Top Layer w10: ADC1.21 2584.14,2885 2589.77,2879.37 ; v1(2120,4035) 2122.5,4037.5 2122.5,4252.5 CO4.4 ; TP19.1 2590,2879.14 2589.77,2879.37 ; v1(2675,2875) 2670.63,2879.37 2589.77,2879.37 ; v1(3270,3180) 3610.75,3180 M1.5 M1.5@3608.39,3190
  Bottom Layer w10: v1(2120,4035) 2403.28,4035 2409.14,4029.14 2409.14,3970 2470,3909.14 2470,3080 v1(2675,2875) 2680,2870 2956.57,2870 2992.5,2905.93 2992.5,3039.07 3133.43,3180 v1(3270,3180)
GND: ADC1.4 ADC1.5 ADC1.12 ADC1.17 ADC1.25 C1.2 C2.2 C3.2 C4.2 C5.2 C6.2 C7.2 C8.2 C9.2 C10.2 C11.2 C12.2 C13.2 C14.2 C15.2 C16.2 CO1.6 CO5.1 M1.1 M1.40 R1.2 R2.2 R3.2 R8.2 R9.2 RD1.3 RD2.3 RD3.3 SEN1.5 SEN2.5 SEN3.5 SEN4.6 SEN4.20 SEN5.2 SW1.2 SW2.2 VR1.4 | length 7533.3
  Top Layer w10: CO1.6 CO1.6@255.65,1524.35 ; v1(525,3200) 525,3131.99 688.29,2968.7 722.41,2968.7 VR1.4 ; C7.2 1025,3250 C8.2 1120.94,3245 1265.94,3100 C9.2 1330,3100 1370,3140 1450,3140 v1(1505,3085) ; C11.2 1335,3439.14 1340.86,3445 1370,3445 v1(1420,3495) ; C10.2 1475.48,3057.95 1502.53,3085 v1(1505,3085) ; C1.2 1480,2095.94 1503.54,2072.4 1512.6,2072.4 1547.35,2037.65 1577.35,2037.65 v1(1585,2030) ; C12.2@1500,3385 1498.82,3383.82 C12.2 1490,3425 v1(1420,3495) ; R1.2 v1(1585,2030) ; ADC1.5 ADC1.4 v1(1505,3085) ; v1(1660,2485) 1565.86,2485 1560,2490.86 1560,2679.14 1565.86,2685 ADC1.12 ADC1.17 ; C4.2 1715.59,2100.94 1692.05,2077.4 1682.99,2077.4 1635.59,2030 v1(1585,2030) ; C14.2 1557.91,3632.91 v1(1420,3495) ; ADC1.25 2085,3085 2105,3065 2394.14,3065 2400,3070.86 v1(2400,3135) ; v1(2200,1655) RD1.3 ; C13.2 v1(2400,3135) ; C15.2 2470,3492.6 2400,3422.6 v1(2400,3135) ; C2.2 3199.18,2200 3214.18,2185 v1(3225,2185) ; R2.2 v1(3225,2185) ; SW1.2 3239.38,3535.62 3284.38,3535.62 v1(3345,3475) 3399.14,3475 3405,3469.14 C16.2 3415,3383.82 M1.1 ; v1(3285,3040) 3350,3040 R9.2 ; C5.2 3250.82,2200 3235.82,2185 v1(3225,2185) ; RD2.3 3930,1867.17 v1(3930,1790) ; M1.40 4317.04,3383.82 4363.22,3430 v1(4440,3430) R8.2 ; C3.2 4795,2210 v1(4950,2210) ; R3.2 v1(4950,2210) ; SW2.2 4954.35,2892.5 5072.5,2892.5 v1(5075,2890) 5080,2895 5080,2930 5270,3120 CO5.1 ; C6.2 5055,2210 v1(4950,2210) ; v1(5535,1730) RD3.3 ; SEN5.2 5753.27,2875.24 5753.27,2816.73 v1(5760,2810) ; SEN4.20 5793.43,2251.22 5804.17,2240.47 5864.53,2240.47 v1(5930,2175) 5960,2205 5960,2410 5934.49,2435.51 5934.49,2604.49 5804.17,2604.49 5793.43,2593.74 SEN4.6
H2S: CO2.1 OPA1.3 R1.1 SEN1.1 SEN1.3 TP1.1 | length 2793.3
  Top Layer w10: CO2.1 1156.85,1948.15 1230,1875 1412.95,1875 TP1.1@1415,1877.05 ; SEN1.3 SEN1.1 1451.06,1840.99 TP1.1@1415,1877.05 ; R1.1@1584.02,1877.09 1576.1,1885 TP1.1 TP1.1@1415,1877.05 ; R1.1 1664.96,1878.07 1713.03,1830 OPA1.3
"H2S 2": ADC1.7 CO3.1 RD1.4 TP7.1 | length 3952.5
  Top Layer w10: CO3.1 1173.65,2415.8 1425,2415.8 ; ADC1.7 1430.86,2935 1425,2929.14 1425,2415.8 ; RD1.4 2397.6,1757.6 TP7.1 2405,2215 2285,2335 1430.86,2335 1425,2340.86 1425,2415.8
MISO: ADC1.23 CO4.2 M1.13 TP17.1 | length 3173
  Top Layer w10: ADC1.23 2755,2985 2780,3010 ; v1(2510,3975) 2514.35,3979.35 2514.35,4250.65 CO4.2 ; v1(2775,3210) 2775,3015 2780,3010 ; v1(3045,3035) 3034.18,3035 3019.18,3020 TP17.1 2790,3020 2780,3010 ; v1(3170,2785) 3613.39,2785 M1.13
  Bottom Layer w10: v1(2510,3975) 2510,3475 v1(2775,3210) ; v1(3045,3035) 3170,2910 v1(3170,2785)
MOSI: ADC1.24 CO4.1 M1.23 TP16.1 | length 4526.2
  Top Layer w10: ADC1.24 2490,3035 2535,3080 TP16.1 ; v1(2705,3060) 2694.18,3060 2674.18,3080 TP16.1 ; CO4.1 2715.55,3195.55 TP16.1 ; M1.23 4084.06,2630.94 v1(4150,2565)
  Bottom Layer w10: v1(2705,3060) 3050,3405 4144.14,3405 4150,3399.14 v1(4150,2565)
NetADC1_6: ADC1.6 C9.1 C10.1 TP13.1 VR1.6 | length 739.8
  Top Layer w10: VR1.6 1117.2,2992.2 TP13.1 1271.18,2995 C9.1 1276.18,2990 C10.1 1405,2985 ADC1.6
NetADC1_27: ADC1.27 C15.1 TP21.1 XTAL1.1 | length 778.8
  Top Layer w10: ADC1.27 2059.14,3185 2065,3190.86 XTAL1.1 2068.43,3340 TP21.1 2215,3330 2359.14,3330 2365,3335.86 2365,3443.43 2470,3548.43 C15.1
NetADC1_28: ADC1.28 C14.1 TP22.1 XTAL1.2 | length 752.2
  Top Layer w10: C14.1 1760,3575.51 1773.31,3562.2 1774.88,3562.2 1902.09,3435 1980,3435 ; TP22.1 1980,3435 ; ADC1.28 2000,3429.14 2005.86,3435 ; XTAL1.2 2005.86,3435 ; 1980,3435 2005.86,3435
NetC16_1: C16.1 M1.3 R6.2 SW1.1 TP23.1 | length 946.6
  Top Layer w10: SW1.1 2962.5,3474.35 R6.2 2970,3295 TP23.1 3395,3295 C16.1 3406.18,3283.82 M1.3
NetCO5_2: CO5.2 M1.37 TP26.1 | length 1755.1
  Top Layer w10: M1.37 4683.82,3233.82 4855,3405 TP26.1 5190,3605 5415,3605 5445,3575 5445,3315 5415,3285 CO5.2
NetCO5_3: CO5.3 M1.36 TP25.1 | length 1049.8
  Top Layer w10: M1.36 4314.54,3194.82 4989.82,3194.82 TP25.1 5095,3210 CO5.3
NetM1_4: M1.4 R5.2 SEN4.9 SEN5.6 TP11.1 | length 4646.1
  Top Layer w10: v1(3485,3235) 3613.39,3235 M1.4 ; v1(5575,3230) 5715.86,3230 ; SEN4.9 5656.54,2590.71 5656.54,2643.17 5670,2656.63 R5.2 5668.03,2710 5668.03,2749.14 5673.89,2755 5785,2755 5785.86,2754.14 5794.14,2754.14 5855,2815 TP11.1 5715.86,3230 ; SEN5.6@5707.36,2985 5710,2987.64 5710,3224.14 5715.86,3230
  Bottom Layer w10: v1(3485,3235) 3959.14,3235 3965,3229.14 3965,2595 4100,2460 4930,2460 4930.86,2459.14 5575,3103.28 v1(5575,3230)
NetM1_6: M1.6 R4.2 SEN4.10 SEN5.1 TP10.1 | length 3737.9
  Top Layer w10: v1(3345,3115) 3385,3155 3516.16,3155 3537.34,3133.82 M1.6 ; v1(5215,2615) 5415,2615 TP10.1 5507.66,2707.66 5585,2707.66 ; SEN4.10 5596.57,2593.74 5585,2605.31 5585,2707.66 ; SEN5.1 5710.63,2815.86 5704.77,2810 R4.2 5585,2707.66
  Bottom Layer w10: v1(3345,3115) 3420,3190 3719.14,3190 3725,3184.14 3725,2665 3975,2415 5005,2415 5205,2615 v1(5215,2615)
NetM1_8: M1.8 R9.1 | length 189.2
  Top Layer w10: R9.1 3610.75,3030 M1.8
NetM1_27: M1.27 R7.2 SW2.1 TP24.1 | length 560.8
  Top Layer w10: M1.27 4307.36,2730 TP24.1 4623.07,2730 R7.2 4633.07,2773.07 SW2.1
NetM1_38: M1.38 R8.1 | length 136.9
  Top Layer w10: M1.38 4438.82,3283.82 R8.1
NetOPA1_2: OPA1.2 OPA1.6 RD1.1 TP4.1 | length 510.7
  Top Layer w10: OPA1.2 1835,1880 1885,1830 OPA1.6 2027.05,1830 2062.05,1795 TP4.1 2126.58,1795 2160.98,1829.41 2197,1829.41 RD1.1
NetOPA2_2: OPA2.2 OPA2.6 RD2.1 TP5.1 | length 531.7
  Top Layer w10: OPA2.2 3540,1965 3585.71,1919.29 3635.2,1919.29 OPA2.6 3642.15,1912.34 3772.66,1912.34 TP5.1 3844.37,1895 3888.12,1938.75 3920.72,1938.75 RD2.1
NetOPA3_2: OPA3.2 OPA3.6 RD3.1 TP6.1 | length 476.5
  Top Layer w10: OPA3.2 5175,1955 5225,1905 OPA3.6 5415,1905 TP6.1 5476.58,1900 5495.98,1919.41 5532,1919.41 RD3.1
NH3: CO2.2 OPA2.3 R2.1 SEN2.1 SEN2.3 TP2.1 | length 4707.8
  Top Layer w10: CO2.2 v1(600,2145) ; v1(2870,1920) TP2.1 ; SEN2.3 SEN2.1 3106.06,1843.94 TP2.1 ; OPA2.3 3418.03,1915 3398.03,1935 R2.1 3225,1934.69 3210.31,1920 TP2.1
  Bottom Layer w10: v1(600,2145) 1115,2145 1270,2300 2465,2300 2840,1925 2865,1925 v1(2870,1920)
"NH3 2": ADC1.8 CO3.2 RD2.4 TP8.1 | length 9230.1
  Top Layer w10: CO3.2 245.65,3540.65 564.35,3540.65 v1(565,3540) ; v1(815,2030) 817.5,2032.5 817.5,2452.5 v1(820,2455) ; ADC1.8 1625,2890 1480.86,2890 1475,2884.14 1475,2380.86 1480.86,2375 3655,2375 3805,2225 ; v1(3945,2250) 3830,2250 3805,2225 ; RD2.4 4150.2,1870.2 TP8.1 3805,2225
  Bottom Layer w10: v1(565,3540) 820,3285 v1(820,2455) ; v1(815,2030) 1100,1745 3440,1745 v1(3945,2250)
RDY: ADC1.22 CO4.6 M1.9 TP18.1 | length 4636.2
  Top Layer w10: v1(1725,3965) 1728.15,3968.15 1728.15,4251.85 CO4.6 ; ADC1.22 2005.16,2929.84 2795.16,2929.84 TP18.1 v1(2940,2910) ; v1(2925,2630) 2990,2695 2990,2860 v1(2940,2910) ; M1.9@3605.75,2975 M1.9 3608.39,2990 3025,2990 2945,2910 v1(2940,2910)
  Bottom Layer w10: v1(1725,3965) 1725,2965 2065,2625 2920,2625 v1(2925,2630)
RESET: ADC1.19 CO4.5 M1.7 TP15.1 | length 3724.8
  Top Layer w10: CO4.5 1929.07,4254.07 1929.07,3970.93 v1(1930,3970) ; ADC1.19 2164.14,2785 ; TP15.1 2170,2779.14 2164.14,2785 ; v1(2230,2785) 2164.14,2785 ; v1(3475,3100) 3539.18,3100 3544.36,3094.82 3603.57,3094.82 M1.7
  Bottom Layer w10: v1(1930,3970) 1930,3085 v1(2230,2785) 2693.7,2785 2733.7,2745 3450,2745 3480,2775 3480,3095 v1(3475,3100)
pads on no net: ADC1.1 ADC1.2 ADC1.10 ADC1.11 ADC1.13 ADC1.14 ADC1.15 ADC1.16 ADC1.18 CO1.3 CO1.5 CO2.4 CO2.5 CO2.6 CO3.4 CO3.5 CO3.6 M1.10 M1.12 M1.14 M1.15 M1.16 M1.17 M1.18 M1.19 M1.20 M1.21 M1.22 M1.24 M1.25 M1.26 M1.28 M1.29 M1.30 M1.31 M1.32 M1.33 M1.34 M1.35 M1.39 M1.41 M1.42 M1.43 M1.44 M1.45 M1.46 M1.47 M1.48 M1.49 OPA1.1 OPA1.5 OPA1.8 OPA2.1 OPA2.5 OPA2.8 OPA3.1 OPA3.5 OPA3.8 RD1.2 RD1.5 RD2.2 RD2.5 RD3.2 RD3.5 SEN4.1 SEN4.2 SEN4.3 SEN4.4 SEN4.5 SEN4.8 SEN4.11 SEN4.12 SEN4.13 SEN4.14 SEN4.15 SEN4.16 SEN4.17 SEN4.18 SEN4.21 SEN5.3 SEN5.4 SEN5.7 VR1.1 VR1.3 VR1.5 VR1.7 VR1.8

## Polygon pours and split planes (outlines as drawn)
GND on GND (split plane): 5979.9,20.1 20.1,20.1 20.1,5064.9 5979.9,5064.9
3V3 on PWR (split plane): 2934.91,3110 2935.26,3107.39 2936.26,3104.96 2937.87,3102.87 2939.96,3101.27 2942.39,3100.26 2945,3099.91 3425,3099.91 3427.61,3100.26 3430.04,3101.27 3432.13,3102.87 3433.73,3104.96 3434.74,3107.39 3435.09,3110 3435.09,3379.91 3579.91,3379.91 3579.91,3110 3580.26,3107.39 3581.27,3104.96 3582.87,3102.87 3584.96,3101.27 3587.39,3100.26 3590,3099.91 5059.91,3099.91 5059.91,2995.09 4950,2995.09 4947.39,2994.74 4944.96,2993.74 4942.87,2992.13 4941.27,2990.04 4940.26,2987.61 4939.91,2985 4939.91,2650.09 4745.09,2650.09 4745.09,2985 4744.74,2987.61 4743.73,2990.04 4742.13,2992.13 4740.04,2993.74 4737.61,2994.74 4735,2995.09 890,2995.09 887.39,2994.74 884.96,2993.74 882.87,2992.13 881.26,2990.04 880.26,2987.61 879.91,2985 879.91,1045.09 20.1,1045.09 20.1,1209.91 735,1209.91 737.61,1210.26 740.04,1211.26 742.13,1212.87 743.73,1214.96 744.74,1217.39 745.09,1220 745.09,3099.91 2015,3099.91 2017.61,3100.26 2020.04,3101.27 2022.13,3102.87 2023.74,3104.96 2024.74,3107.39 2025.09,3110 2025.09,3194.91 2184.91,3194.91 2184.91,3110 2185.26,3107.39 2186.26,3104.96 2187.87,3102.87 2189.96,3101.27 2192.39,3100.26 2195,3099.91 2775,3099.91 2777.61,3100.26 2780.04,3101.27 2782.13,3102.87 2783.74,3104.96 2784.74,3107.39 2785.09,3110 2785.09,3434.91 2934.91,3434.91
-5V0 on PWR (split plane): 4879.91,1925.09 1205,1925.09 1202.39,1924.74 1199.96,1923.74 1197.87,1922.13 1196.26,1920.04 1195.26,1917.61 1194.91,1915 1194.91,825 1194.91,665.09 20.1,665.09 20.1,814.91 1070,814.91 1072.61,815.26 1075.04,816.27 1077.13,817.87 1078.74,819.96 1079.74,822.39 1080.09,825 1080.09,2389.91 4879.91,2389.91
5V0 on PWR (split plane): 162 vertices, not listed, extent 20.1,20.1 5979.9,5064.9

## Other copper
PWR (plane layer: these items are gaps in the copper):
  lines w20: 0,655 1205,655 1205,825 1205,1915 4890,1915 4890,2400 1070,2400 1070,825 0,825 ; 0,1035 890,1035 890,2985 4735,2985 ; 0,1220 735,1220 735,3110 2015,3110 2015,3205 2195,3205 ; 0,1345 475,1345 475,3330 ; 2110,3205 2195,3205 ; 2320,2985 4735,2985 ; 2195,3205 2195,3110 2775,3110 2775,3445 2945,3445 2945,3110 3425,3110 3425,3390 3590,3390 3590,3110 5070,3110 5070,2985 ; 4735,2985 4735,2640 4950,2640 4950,2985 ; 4950,2985 5070,2985 ; 4950,2985 5070,2985

## Silkscreen, mask and mechanical layers (free items; w line width, h text height)
Mechanical 1:
  the board outline again, w20

## Text inside footprints (layer, text, board x,y; h text height)
M1: Top Overlay "*" at 3534.06,3471.73 h50; Mechanical 13 "*" at 3656.57,3358.82 h50
VR1: Top Overlay "*" at 680,3060 h50; Mechanical 13 "*" at 749.5,3015 h50